# Altium PCB PCB1.PcbDoc (part 1 of 2)
Units mil, origin at the board's own origin, x right, y up, seen from the top; angles counter-clockwise.
Board outline 3500 x 3500 mil, 2 copper layers (Top Layer, Bottom Layer); 93 components, 107 nets, 503 pads, 226 vias.
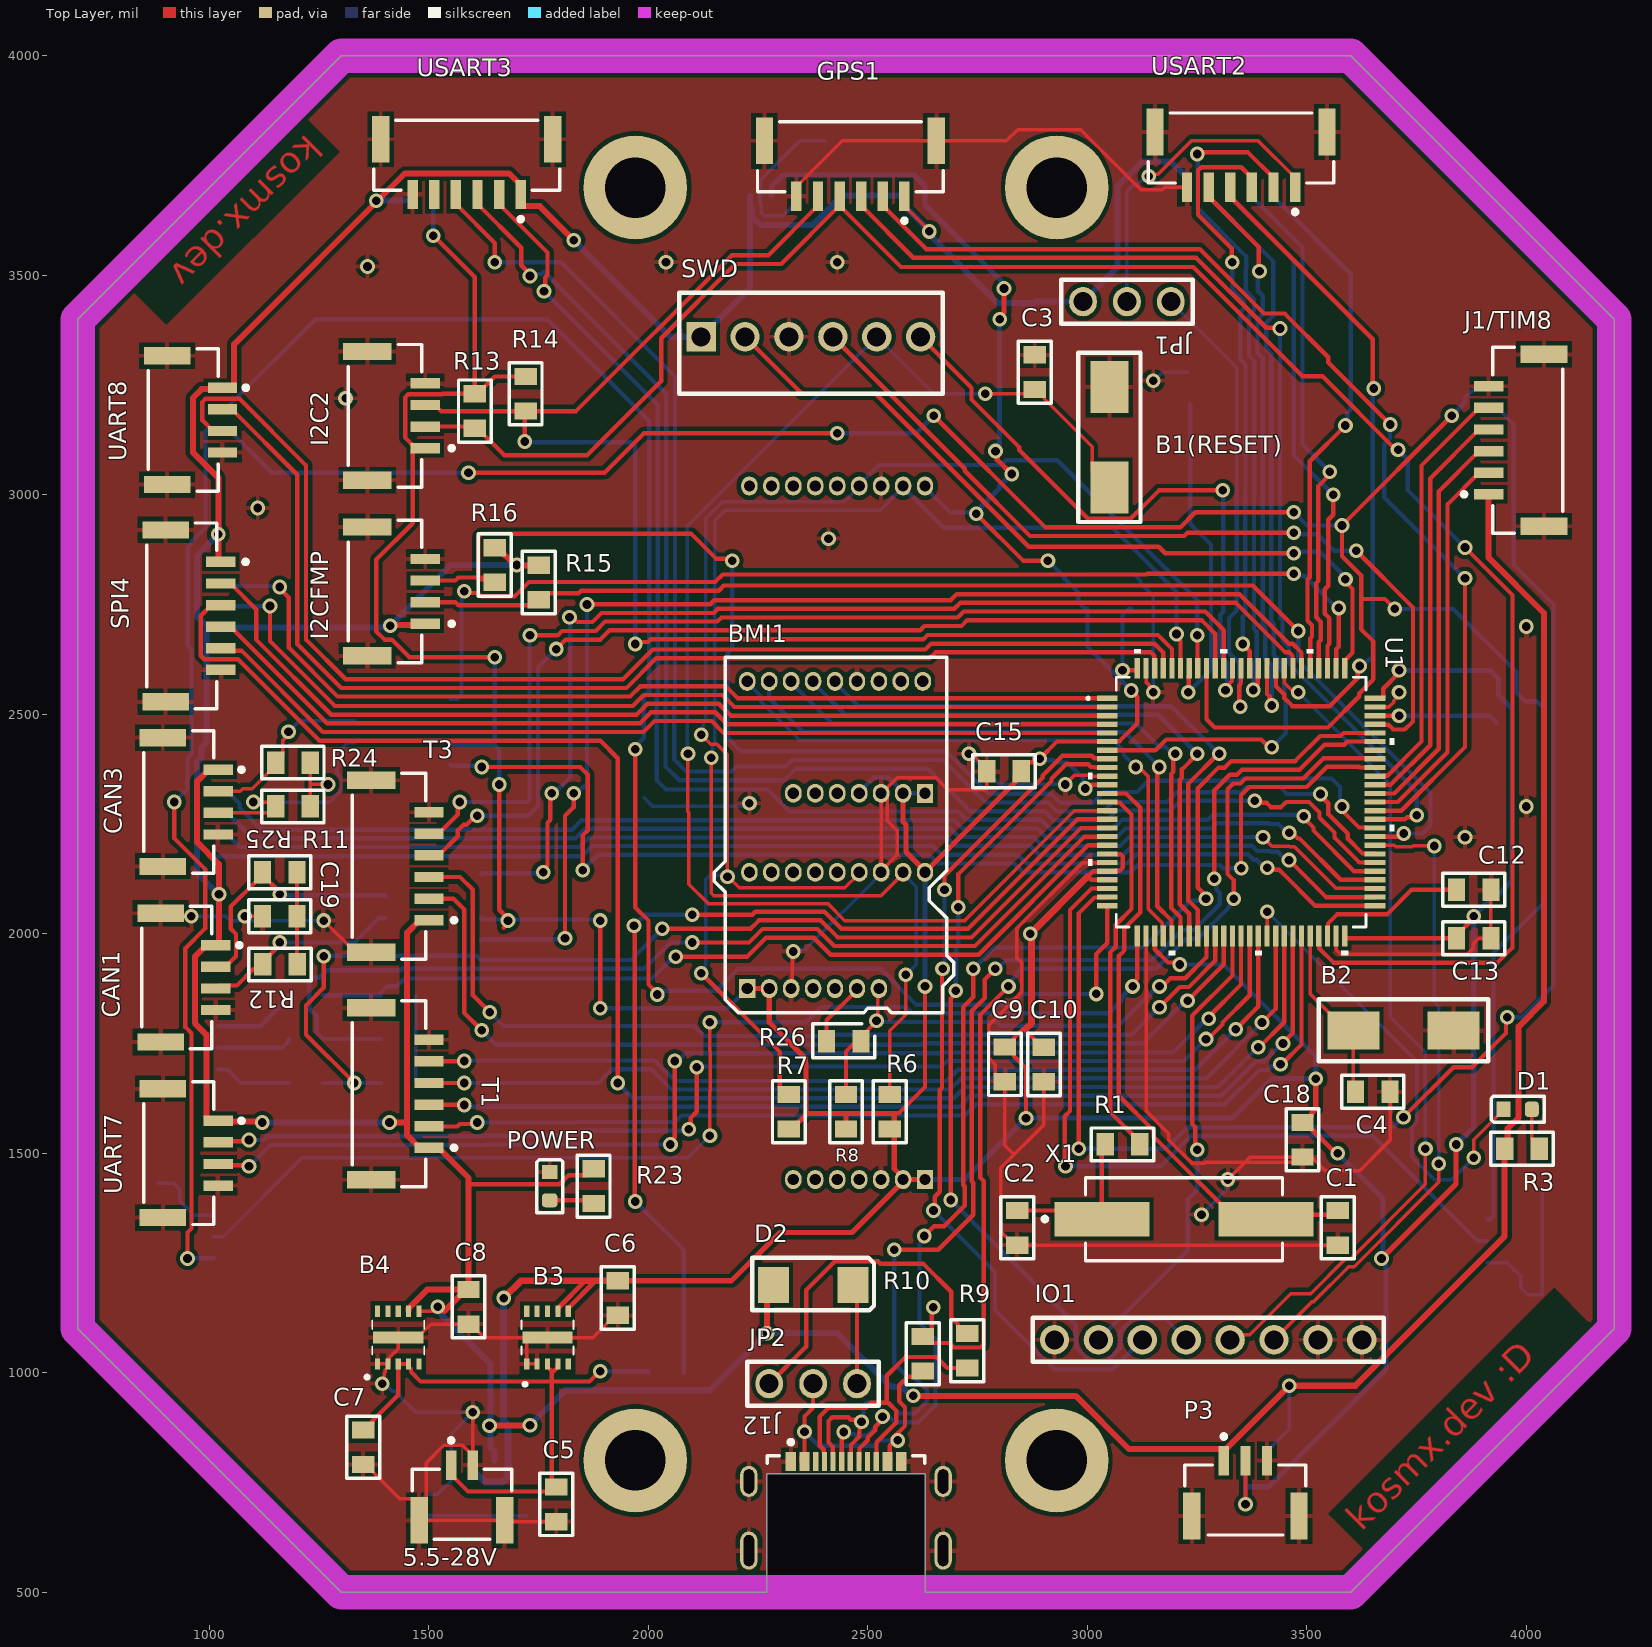
[diagram p0: Top Layer view]
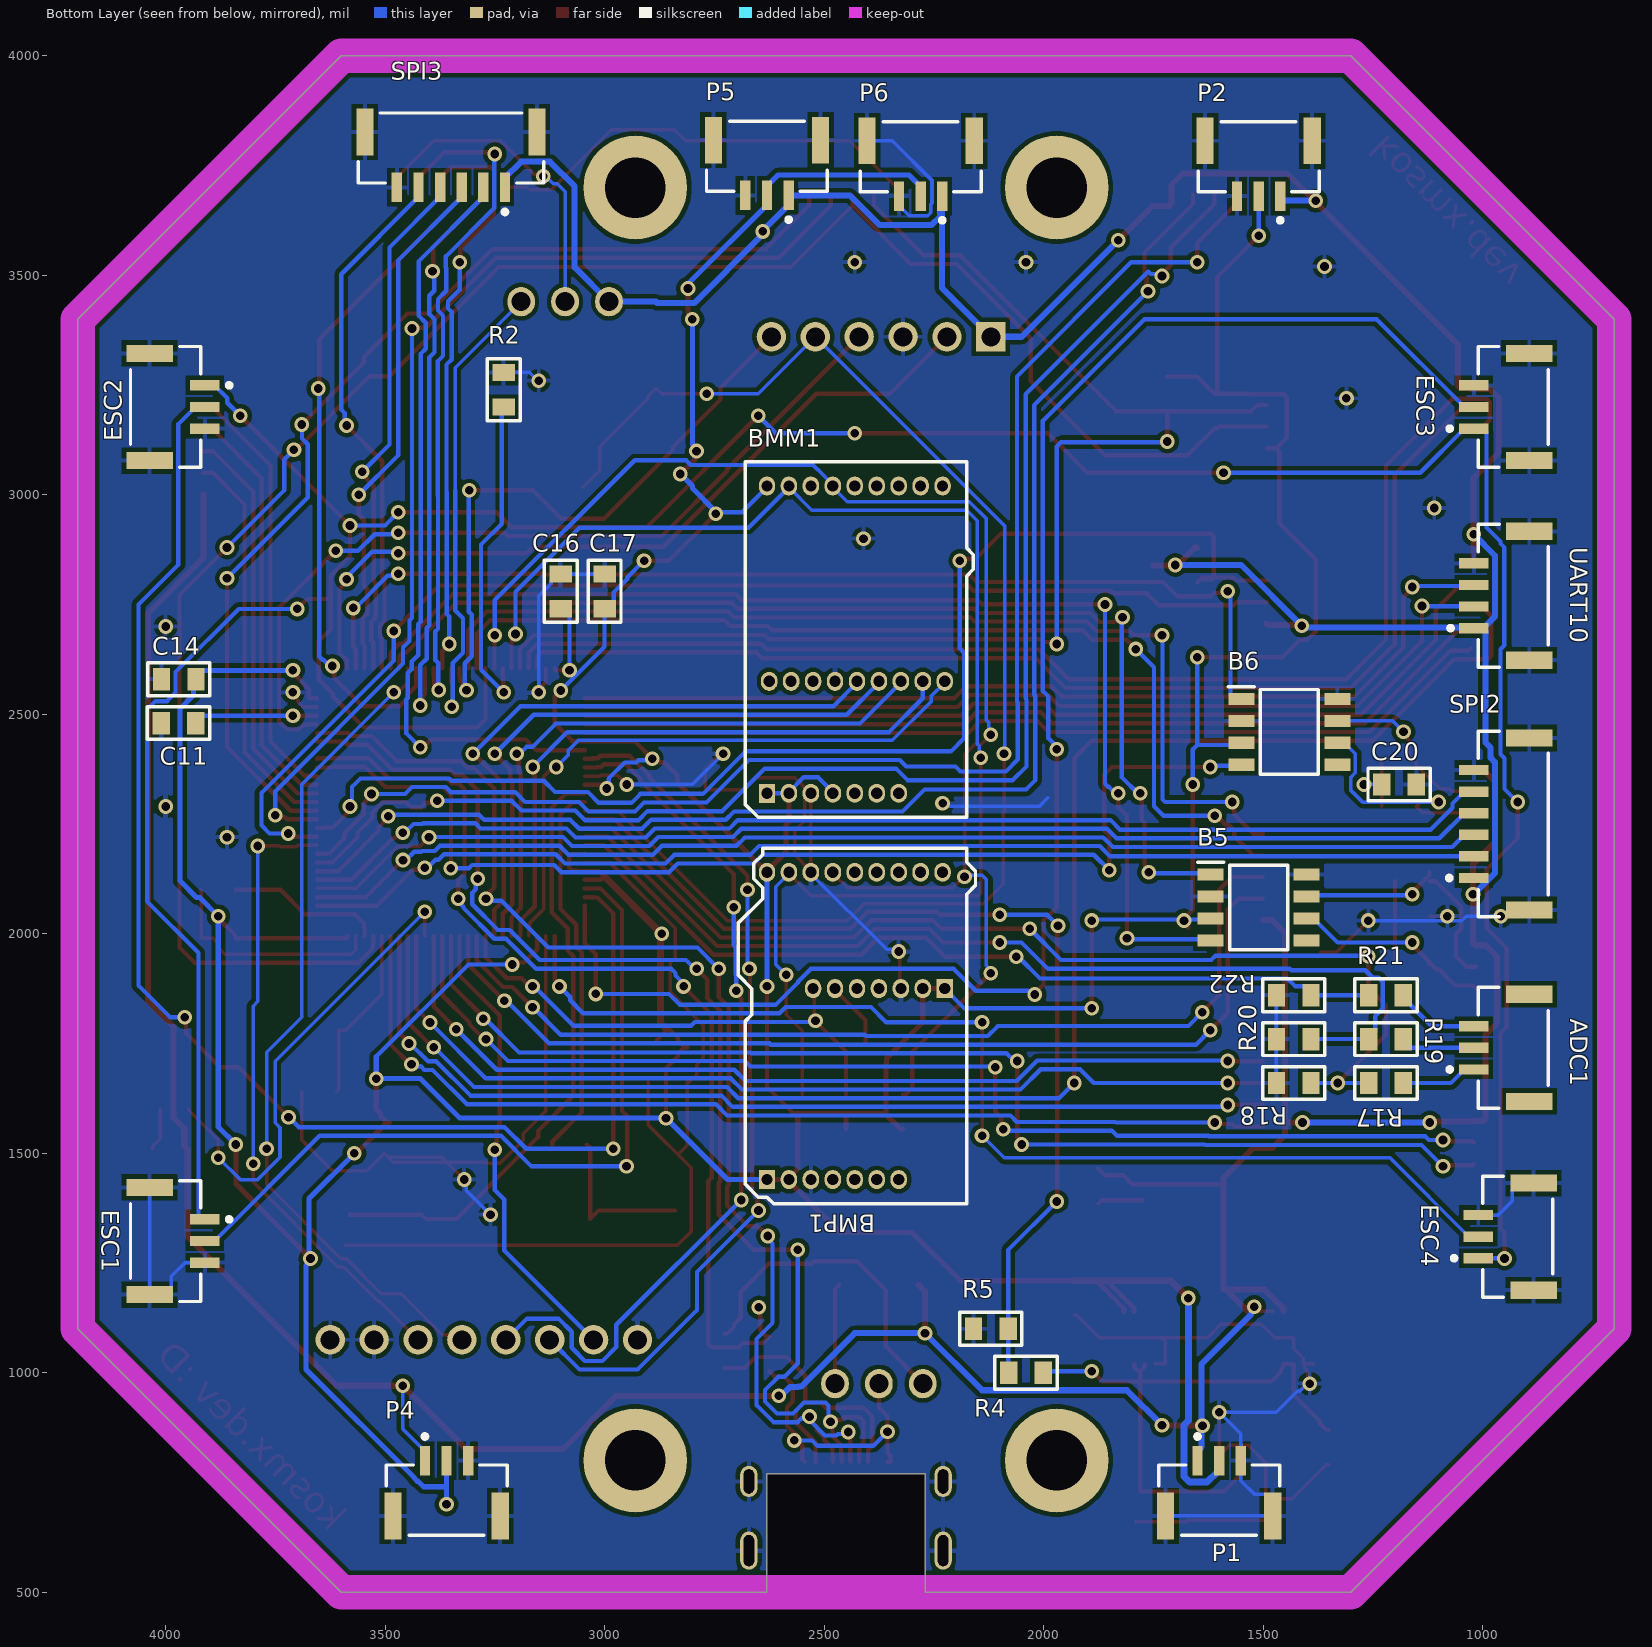
[diagram p1: Bottom Layer view, seen from below]
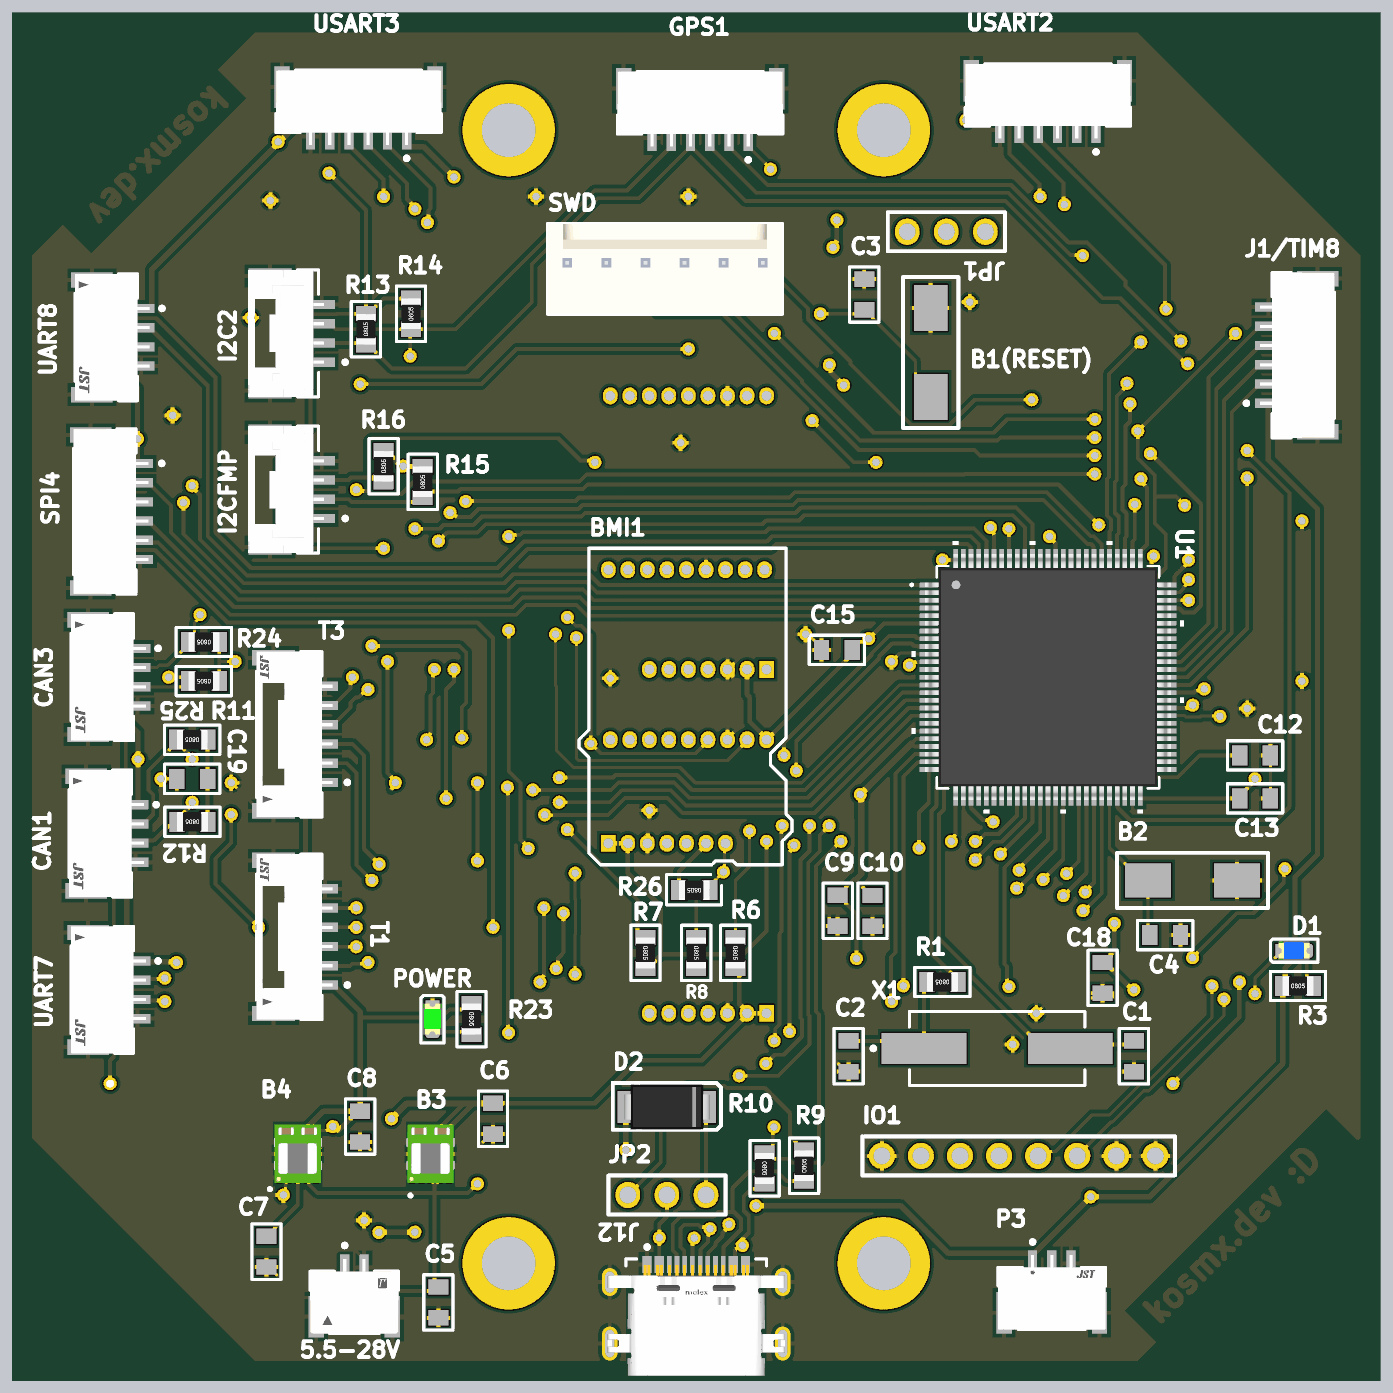
[diagram p3: 3D render of the assembled board from above, using the file's embedded part models]
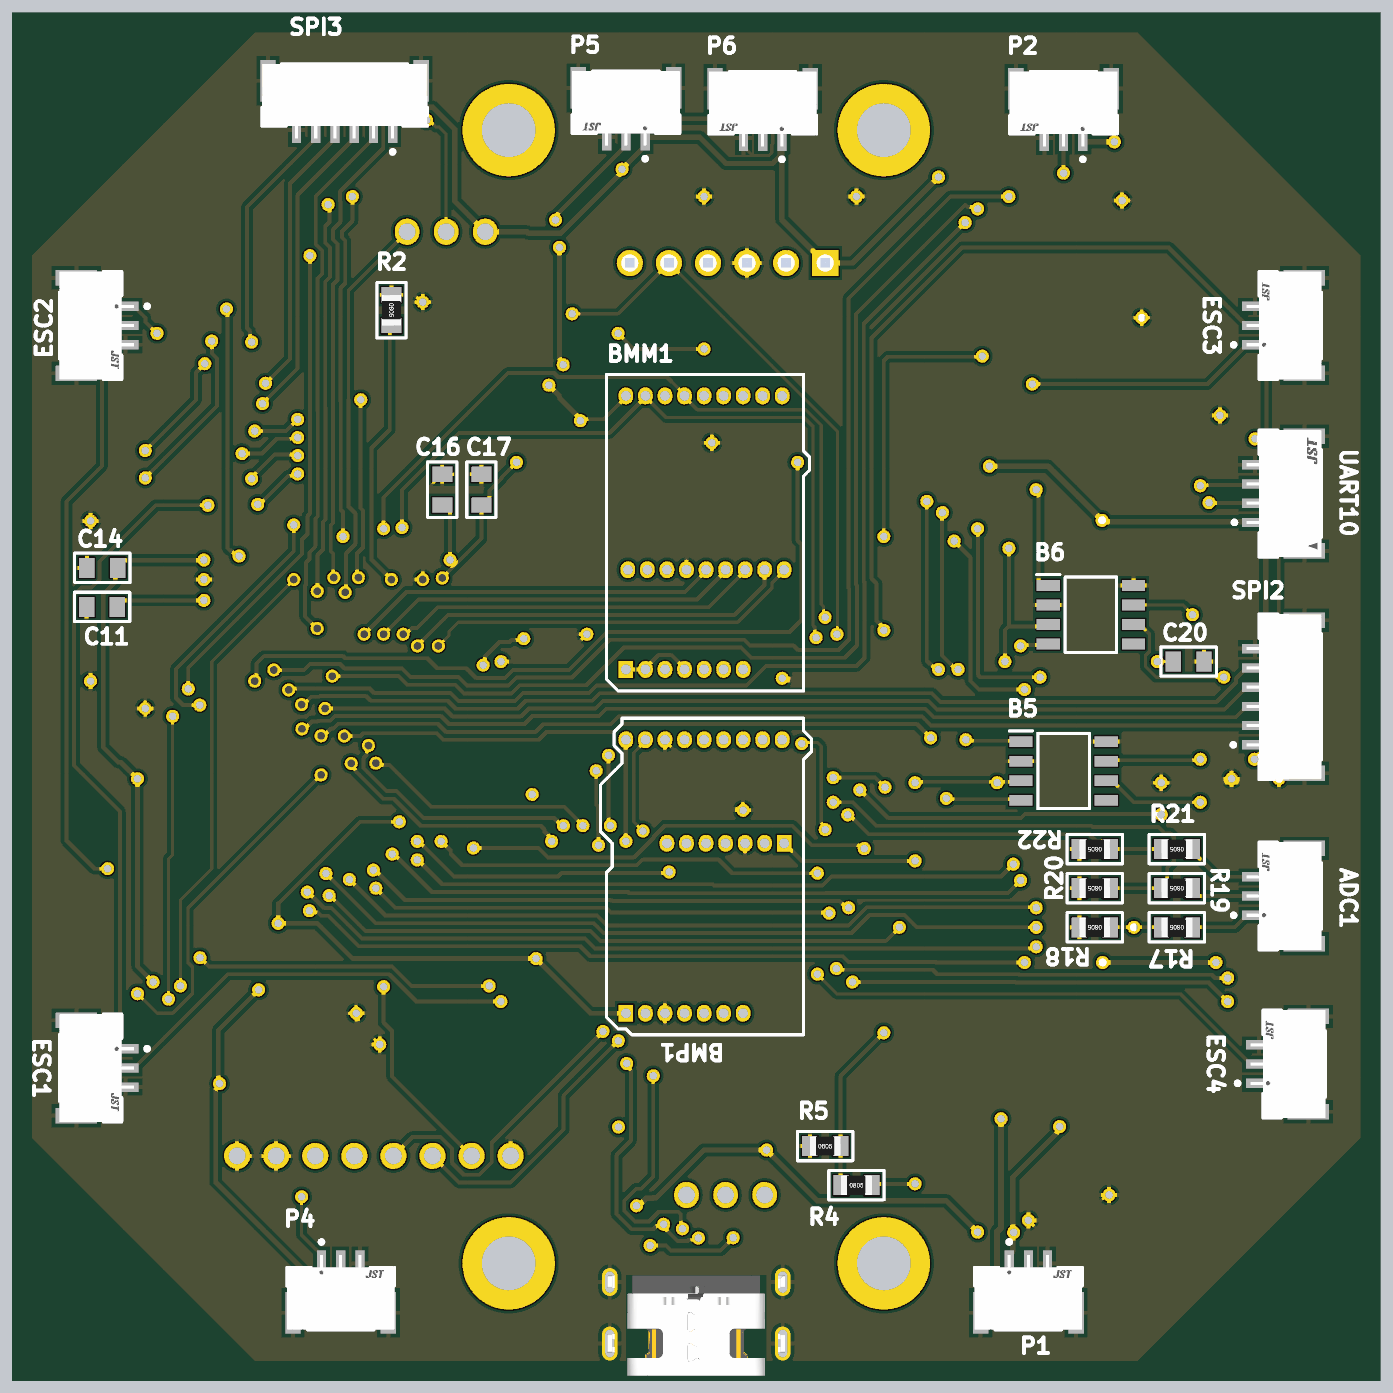
[diagram p4: 3D render of the assembled board from below, using the file's embedded part models]

## Layer stack, top to bottom
Top Solder: solder mask 0.4, Solder Resist, Dk 3.5
Top Layer: signal copper 1.4
Dielectric 1: dielectric 12.6, FR-4, Dk 4.8
Bottom Layer: signal copper 1.4
Bottom Solder: solder mask 0.4, Solder Resist, Dk 3.5

## Board outline
2630,500 2630,770 2270,770 2270,500 1300,500 700,1100 700,3400 1300,4000 3600,4000 4200,3400 4200,1100 3600,500 3500,500

## Design rules (kind name [scope] priority, off if disabled: settings)
Clearance [All] p1: gap=9.84 ignorepadtopadclearanceinfootprint=FALSE except(7.48: Arc-SMDPad Track-SMDPad SMDPad-SMDPad)
HoleSize [All] p1: absolutevalues=TRUE maxlimit=314.96 minlimit=11.81 maxpercent=80.000 minpercent=20.000
HoleToHoleClearance [All] p1: gap=9.84 allowstackedmicrovias=TRUE
MinimumSolderMaskSliver [All] p1: minsoldermaskwidth=3.74
PolygonConnect [All] p1: connectstyle=Relief reliefconductorwidth=10 reliefentries=4 polygonreliefangle="90 Angle" airgapwidth=10
RoutingVias [All] p1: holewidth=19.68 width=33.46 viastyle="Through Hole" minholewidth=11.81 minwidth=25.59 maxholewidth=78.74 maxwidth=98.43
SilkToSilkClearance [All] p1: silktosilkclearance=3.94
SilkToSolderMaskClearance [IsPad] p1: minsilkscreentomaskgap=3.94 clearancetoexposedcopper=TRUE
SolderMaskExpansion [All] p1: expansion=4 istentingtop=FALSE
Width [All] p1: maxlimit=78.74 minlimit=7.87 preferedwidth=10
25 further rules are at their usual default settings.

## Classes and differential pairs
component class powah: 5.5-28V B3 B4 C5 C6 C7 C8 C9 C10 C11 C12 C13 C14 C15 C16 C17 C18 P1 P2 P3 P4 P5 P6 POWER R4 R5 R23
component class on-board_sensors: BMI1 BMM1 BMP1 R6 R7 R8
component class io: GPS1 J1/TIM8 JP1 SWD U1 USART2 USART3
component class io2: B1(RESET) B2 C1 C2 C3 C4 D1 R1 R2 R3 X1
component class GPIO: B5 B6 C19 C20 CAN1 CAN3 I2C2 I2CFMP R11 R12 R13 R14 R15 R16 R24 R25 SPI2 SPI3 T1 T3
component class GPIO2: ADC1 IO1 R17 R18 R19 R20 R21 R22 SPI4 UART7 UART8 UART10
component class ESC_and_USB: D2 ESC1 ESC2 ESC3 ESC4 J12 JP2 R9 R10

## Components (designator, comment, footprint, x,y, rotation, side; value= is the part's Value field where it differs from the comment)
5.5-28V "" FP-SM02B-GHS-TB_LF_SN-MFG 1575,700 r0 top
ADC1 "BM03B-GHS-TBT(LF)(SN)(N)" FP-SM03B-GHS-TB_LF_SN-MFG 930,1740 r90 bottom
B1(RESET) "Button" FP_BTN_SMD_3x6 3050,3131 r90 top
B2 "Button" FP_BTN_SMD_3x6 3720,1780 r0 top
B3 "LMZM23600V3SILR" LMZM23601V5SILR 1770,1062.28 r90 top
B4 "LMZM23600V5SILR" LMZM23601V5SILR 1430,1062.28 r90 top
B5 "BD41041FJ-CE2" SOIC127P600X165-8N 1510,2060 r180 bottom
B6 "BD41041FJ-CE2" SOIC127P600X165-8N 1440,2460 r180 bottom
BMI1 "BMI088_board" DIP7-9 2225,1875 r90 top
BMM1 "BMM150_board" DIP7-9 2630,2320 r90 bottom
BMP1 "BMP390_board_1" DIP7-9 2630,1440 r90 bottom
C1 "22pF" FP_0805_CAP_085 3570,1330 r90 top
C2 "22pF" FP_0805_CAP_085 2840,1330 r90 top
C3 "100nF" FP_0805_CAP_085 2880,3279.37 r90 top
C4 "100nF" FP_0805_CAP_085 3650,1640 r0 top
C5 "10µF" FP_0805_CAP_085 1790,700 r270 top
C6 "33µF" FP_0805_CAP_085 1930,1170 r90 top
C7 "10µF" FP_0805_CAP_085 1350,830 r270 top
C8 "22µF" FP_0805_CAP_085 1590,1150 r90 top
C9 "100nF" FP_0805_CAP_085 2812,1702.37 r90 top
C10 "1µF" FP_0805_CAP_085 2901,1702 r90 top
C11 "2.2μF" FP_0805_CAP_085 3970.63,2480 r180 bottom
C12 "2.2μF" FP_0805_CAP_085 3880,2100 r180 top
C13 "100nF" FP_0805_CAP_085 3880,1990 r180 top
C14 "100nF" FP_0805_CAP_085 3970,2580 r180 bottom
C15 "100nF" FP_0805_CAP_085 2810,2370 r0 top
C16 "100nF" FP_0805_CAP_085 3100,2780 r270 bottom
C17 "100nF" FP_0805_CAP_085 3000,2780 r270 bottom
C18 "100nF" FP_0805_CAP_085 3490,1530.63 r90 top
C19 "4.7nF" FP_0805_CAP_085 1160,2040 r0 top
C20 "4.7nF" FP_0805_CAP_085 1190,2340 r180 bottom
CAN1 "BM04B-GHS-TBT(LF)(SN)(N)" FP-SM04B-GHS-TB_LF_SN-MFG 925,1900 r270 top
CAN3 "BM04B-GHS-TBT(LF)(SN)(N)" FP-SM04B-GHS-TB_LF_SN-MFG 930,2300 r270 top
D1 "LED" FP_0805_LED_BLUE 3980,1600 r180 top
D2 "SCHOTTKY" FP_SMA 2375,1200 r0 top
ESC1 "BM03B-GHS-TBT(LF)(SN)(N)" FP-SM03B-GHS-TB_LF_SN-MFG 4000,1300 r270 bottom
ESC2 "BM03B-GHS-TBT(LF)(SN)(N)" FP-SM03B-GHS-TB_LF_SN-MFG 4000,3200 r270 bottom
ESC3 "BM03B-GHS-TBT(LF)(SN)(N)" FP-SM03B-GHS-TB_LF_SN-MFG 930,3200 r90 bottom
ESC4 "BM03B-GHS-TBT(LF)(SN)(N)" FP-SM03B-GHS-TB_LF_SN-MFG 920,1310 r90 bottom
GPS1 "BM06B-GHS-TBT(LF)(SN)" FP-SM06B-GHS-TB_LF_SN-MFG 2460,3770 r180 top
I2C2 "BM04B-GHS-TBT(LF)(SN)(N)" FP-BM04B-GHS-TBT_LF_SN-MFG 1400,3180 r270 top
I2CFMP "BM04B-GHS-TBT(LF)(SN)(N)" FP-BM04B-GHS-TBT_LF_SN-MFG 1400,2780 r270 top
IO1 "8pin" "PINS 8x1" 3625,1075 r270 top
J1/TIM8 "BM06B-GHS-TBT(LF)(SN)" FP-SM06B-GHS-TB_LF_SN-MFG 4003.58,3124.13 r90 top
J12 "216990-0001" USBC-FP-216990-0001-MFG 2450,640 r0 top
JP1 "JMP3" JMP3 3190,3440 r270 top
JP2 "JMP3" JMP3 2275,975 r90 top
P1 "BM03B-GHS-TBT(LF)(SN)(N)" FP-SM03B-GHS-TB_LF_SN-MFG 1600,710 r180 bottom
P2 "BM03B-GHS-TBT(LF)(SN)(N)" FP-SM03B-GHS-TB_LF_SN-MFG 1510,3770 r0 bottom
P3 "BM03B-GHS-TBT(LF)(SN)(N)" FP-SM03B-GHS-TB_LF_SN-MFG 3360,710 r0 top
P4 "BM03B-GHS-TBT(LF)(SN)(N)" FP-SM03B-GHS-TB_LF_SN-MFG 3360,710 r180 bottom
P5 "BM03B-GHS-TBT(LF)(SN)(N)" FP-SM03B-GHS-TB_LF_SN-MFG 2630,3771.54 r0 bottom
P6 "BM03B-GHS-TBT(LF)(SN)(N)" FP-SM03B-GHS-TB_LF_SN-MFG 2280,3770 r0 bottom
POWER "LED" FP_0805_LED_GREEN 1775,1425 r90 top
R1 "0" FP_0805_RES 3080,1520 r180 top
R2 "10K" FP_0805_RES 3230,3239.37 r270 bottom
R3 "470" FP_0805_RES 3990,1510 r0 top
R4 "180K" FP_0805_RES 2040,1000 r180 bottom
R5 "24K" FP_0805_RES 2120,1100 r180 bottom
R6 "1K8" FP_0805_RES 2550,1594.37 r270 top
R7 "1K8" FP_0805_RES 2320,1594.37 r270 top
R8 "1K" FP_0805_RES 2450,1594.37 r270 top
R9 "5K1" FP_0805_RES 2726,1050 r90 top
R10 "5K1" FP_0805_RES 2625,1043 r270 top
R11 "60" FP_0805_RES 1160,2140 r180 top
R12 "60" FP_0805_RES 1160.63,1930 r180 top
R13 "1K8" FP_0805_RES 1604.58,3190.63 r90 top
R14 "1K8" FP_0805_RES 1720,3230 r90 top
R15 "1K8" FP_0805_RES 1750,2800 r90 top
R16 "1K8" FP_0805_RES 1650,2840 r90 top
R17 "0" FP_0805_RES 1220,1660 r0 bottom
R18 "INF" FP_0805_RES 1430,1660 r0 bottom
R19 "0" FP_0805_RES 1220,1760 r0 bottom
R20 "INF" FP_0805_RES 1430,1760 r0 bottom
R21 "180K" FP_0805_RES 1220,1860 r0 bottom
R22 "24K" FP_0805_RES 1430,1860 r0 bottom
R23 "470" FP_0805_RES 1875,1425 r270 top
R24 "60" FP_0805_RES 1190,2390 r180 top
R25 "60" FP_0805_RES 1190,2290 r180 top
R26 "220" FP_0805_RES 2445,1755 r180 top
SPI2 "BM06B-GHS-TBT(LF)(SN)" FP-SM06B-GHS-TB_LF_SN-MFG 930,2250 r90 bottom
SPI3 "BM06B-GHS-TBT(LF)(SN)" FP-SM06B-GHS-TB_LF_SN-MFG 3350,3790 r0 bottom
SPI4 "BM06B-GHS-TBT(LF)(SN)" FP-SM06B-GHS-TB_LF_SN-MFG 936.42,2724.13 r270 top
SWD "Connector" FP_CONN6_TAP_254MM 2120,3360 r270 top
T1 "BM06B-GHS-TBT(LF)(SN)" FP-BM06B-GHS-TBT_LF_SN-MFG 1408.46,1635.39 r90 top
T3 "BM06B-GHS-TBT(LF)(SN)" FP-BM06B-GHS-TBT_LF_SN-MFG 1408.46,2153.82 r90 top
U1 "STM32F423VHT6" LQFP100-14x14mm 3350,2300 r0 top
UART7 "BM04B-GHS-TBT(LF)(SN)(N)" FP-SM04B-GHS-TB_LF_SN-MFG 930,1500 r270 top
UART8 "BM04B-GHS-TBT(LF)(SN)(N)" FP-SM04B-GHS-TB_LF_SN-MFG 940,3170 r270 top
UART10 "BM04B-GHS-TBT(LF)(SN)(N)" FP-SM04B-GHS-TB_LF_SN-MFG 930,2770 r90 bottom
USART2 "BM06B-GHS-TBT(LF)(SN)" FP-SM06B-GHS-TB_LF_SN-MFG 3350,3790 r180 top
USART3 "BM06B-GHS-TBT(LF)(SN)" FP-SM06B-GHS-TB_LF_SN-MFG 1585.87,3773.58 r180 top
X1 "ECS-80-18-5PX-TR" ECS-80-18-5PX-TR_V 3220,1350 r0 top

## Footprints (in the part's own frame and the unit in brackets; to place one, negate y for a bottom-side part, rotate by r counter-clockwise, add the part's x,y. Pads: shape width x height; smd on the part's side, far side on the other; paste and mask are expansions set on the pad)
DIP7-9 [mm]
  rect 1.1x0.95 hole 0.65: 1(0,0)
  oval 1.1x0.95 hole 0.65: 2(0,-1.27) 3(0,-2.54) 4(0,-3.81) 5(0,-5.08) 6(0,-6.35) 7(0,-7.62) 8(17.78,0) 9(17.78,-1.27) 10(17.78,-2.54) 11(17.78,-3.81) 12(17.78,-5.08) 13(17.78,-6.35) 14(17.78,-7.62) 15(17.78,-8.89) 16(17.78,-10.16)
  silkscreen extent -1.4,-11.94 19.18,1.91
ECS-80-18-5PX-TR_V [mm] "SMD, 2-Leads, Body 11.4x4.8mm, Height 4.3mm"
  rect 5.5x2 smd: 1(-4.75,0) 2(4.75,0)
  silkscreen extent -8.17,-2.4 5.7,2.4, body extent -6.6,-2.4 6.6,2.4, height 4.3
FP-BM04B-GHS-TBT_LF_SN-MFG [mm]
  rect 0.6x1.7 smd paste+0 mask+0: 1(1.875,2.325) 2(0.625,2.325) 3(-0.625,2.325) 4(-1.875,2.325)
  rect 1x2.8 smd paste+0 mask+0: 5(-3.725,-1.025) 6(3.725,-1.025)
  silkscreen extent -4.13,-2.12 4.13,3.98, body extent -4.33,-2.52 4.33,3.27, height 0.25
FP-BM06B-GHS-TBT_LF_SN-MFG [mm]
  rect 0.6x1.7 smd paste+0 mask+0: 1(-3.125,-2.325) 2(-1.875,-2.325) 3(-0.625,-2.325) 4(0.625,-2.325) 5(1.875,-2.325) 6(3.125,-2.325)
  rect 1x2.8 smd paste+0 mask+0: 7(-4.975,1.025) 8(4.975,1.025)
  silkscreen extent -5.38,-3.9 5.38,2.12, body extent -5.58,-3.27 5.58,2.52, height 0.25
FP-SM02B-GHS-TB_LF_SN-MFG [mm]
  rect 0.6x1.7 smd paste+0 mask+0: 1(-0.625,2.275) 2(0.625,2.275)
  rect 1x2.7 smd paste+0 mask+0: 3(-2.475,-0.925) 4(2.475,-0.925)
  silkscreen extent -2.88,-2.02 2.88,3.82, body extent -3.08,-2.37 3.08,3.22, height 0.25
FP-SM03B-GHS-TB_LF_SN-MFG [mm]
  rect 0.6x1.7 smd paste+0 mask+0: 1(-1.25,2.275) 2(0,2.275) 3(1.25,2.275)
  rect 1x2.7 smd paste+0 mask+0: 4(-3.1,-0.925) 5(3.1,-0.925)
  silkscreen extent -3.5,-2.02 3.5,3.8, body extent -3.5,-2.02 3.5,2.83, height 4.25
FP-SM04B-GHS-TB_LF_SN-MFG [mm]
  rect 0.6x1.7 smd paste+0 mask+0: 1(-1.875,2.275) 2(-0.625,2.275) 3(0.625,2.275) 4(1.875,2.275)
  rect 1x2.7 smd paste+0 mask+0: 5(-3.725,-0.925) 6(3.725,-0.925)
  silkscreen extent -4.13,-2.02 4.13,3.75, body extent -4.33,-2.37 4.33,3.22, height 0.25
FP-SM06B-GHS-TB_LF_SN-MFG [mm]
  rect 0.6x1.7 smd paste+0 mask+0: 1(-3.125,2.275) 2(-1.875,2.275) 3(-0.625,2.275) 4(0.625,2.275) 5(1.875,2.275) 6(3.125,2.275)
  rect 1x2.7 smd paste+0 mask+0: 7(-4.975,-0.925) 8(4.975,-0.925)
  silkscreen extent -5.38,-2.02 5.38,3.82, body extent -5.58,-2.37 5.58,3.22, height 0.25
FP_0805_CAP_085 [mm] "0805 kapacit�s YAGEO 0.85mm magas"
  rect 1x1.3 smd: 1(-1,0) 2(1,0)
  silkscreen extent -1.8,-0.95 1.8,0.95, body extent -1,-0.64 1.03,0.64, height 0.85
FP_0805_LED_BLUE [mm] "0805i"
  rrect50% 0.8x0.9 smd: A(-0.825,0)
  rect 0.8x0.9 smd: K(0.825,0)
  silkscreen extent -1.55,-0.75 1.53,0.75, body extent -1.01,-0.63 1.01,0.63, height 1.1
FP_0805_LED_GREEN [mm] "0805 m�ret� z�ld LED"
  rrect50% 0.8x0.9 smd: A(-0.825,0)
  rect 0.8x0.9 smd: K(0.825,0)
  silkscreen extent -1.55,-0.75 1.53,0.75, body extent -1.01,-0.63 1.01,0.63, height 1.1
FP_0805_RES [mm] "0805 ellen�ll�s"
  rect 1x1.3 smd: 1(-1,0) 2(1,0)
  silkscreen extent -1.8,-0.95 1.8,0.95, body extent -1,-0.62 1,0.63, height 0.62
FP_BTN_SMD_3x6 [mm] "TACT 3x 6 2P"
  rect 3x2.2 smd: 1(-2.9,0) 2(2.9,0)
  silkscreen extent -4.9,-1.8 4.9,1.8, body extent -2.9,-1.6 2.9,1.6, height 3.5
FP_CONN6_TAP_254MM [mm] "�ll� hat p�lus� t�pcsatlakoz� 2.54mm"
  rect 1.7x1.7 hole 1.1: 1(0,0)
  round 1.7 hole 1.1: 2(0,2.54) 3(0,5.08) 4(0,7.62) 5(0,10.16) 6(0,12.7)
  silkscreen extent -2.54,-1.27 3.3,13.97, body extent -2.52,-1.27 3.28,13.97, height 11.56
FP_SMA [mm] "SMA footprint"
  rect 1.8x2.1 smd: 1(-2.3,0) 2(2.3,0)
  silkscreen extent -3.52,-1.48 3.52,1.58, body extent -2.8,-1.47 2.8,1.48, height 2.7
JMP3 [mm]
  oval 1.7x1.6 hole 1.1: 1(0,0) 2(0,-2.54) 3(0,-5.08)
  silkscreen extent -1.27,-6.35 1.27,1.27
LMZM23601V5SILR [mm]
  rect 0.65x0.3 smd: 1(-1.075,1.2) 2(-1.075,0.6) 3(-1.075,0) 4(-1.075,-0.6) 5(-1.075,-1.2) 6(1.975,-1.2) 7(1.975,-0.6) 8(1.975,0) 9(1.975,0.6) 10(1.975,1.2)
  rect 0.7x2.9 smd: 11(0.45,0)
  silkscreen extent -2.35,-1.5 1.45,1.5, body extent -1.44,-1.5 2.36,1.5, height 1.49
LQFP100-14x14mm [mil]
  rect 47x12 smd paste+0 mask+0: 1(-305.12,236.22) 2(-305.12,216.54) 3(-305.12,196.85) 4(-305.12,177.17) 5(-305.12,157.48) 6(-305.12,137.8) 7(-305.12,118.11) 8(-305.12,98.43) 9(-305.12,78.74) 10(-305.12,59.06) 11(-305.12,39.37) 12(-305.12,19.69) 13(-305.12,0) 14(-305.12,-19.68) 15(-305.12,-39.37) 16(-305.12,-59.06) 17(-305.12,-78.74) 18(-305.12,-98.43) 19(-305.12,-118.11) 20(-305.12,-137.8) 21(-305.12,-157.48) 22(-305.12,-177.17) 23(-305.12,-196.85) 24(-305.12,-216.54) 25(-305.12,-236.22) 51(305.12,-236.22) 52(305.12,-216.54) 53(305.12,-196.85) 54(305.12,-177.17) 55(305.12,-157.48) 56(305.12,-137.8) 57(305.12,-118.11) 58(305.12,-98.43) 59(305.12,-78.74) 60(305.12,-59.06) 61(305.12,-39.37) 62(305.12,-19.68) 63(305.12,0) 64(305.12,19.68) 65(305.12,39.37) 66(305.12,59.06) 67(305.12,78.74) 68(305.12,98.43) 69(305.12,118.11) 70(305.12,137.8) 71(305.12,157.48) 72(305.12,177.17) 73(305.12,196.85) 74(305.12,216.54) 75(305.12,236.22)
  rect 12x47 smd paste+0 mask+0: 26(-236.22,-305.12) 27(-216.54,-305.12) 28(-196.85,-305.12) 29(-177.17,-305.12) 30(-157.48,-305.12) 31(-137.8,-305.12) 32(-118.11,-305.12) 33(-98.43,-305.12) 34(-78.74,-305.12) 35(-59.06,-305.12) 36(-39.37,-305.12) 37(-19.68,-305.12) 38(0,-305.12) 39(19.68,-305.12) 40(39.37,-305.12) 41(59.06,-305.12) 42(78.74,-305.12) 43(98.43,-305.12) 44(118.11,-305.12) 45(137.8,-305.12) 46(157.48,-305.12) 47(177.17,-305.12) 48(196.85,-305.12) 49(216.54,-305.12) 50(236.22,-305.12) 76(236.22,305.12) 77(216.54,305.12) 78(196.85,305.12) 79(177.17,305.12) 80(157.48,305.12) 81(137.8,305.12) 82(118.11,305.12) 83(98.43,305.12) 84(78.74,305.12) 85(59.06,305.12) 86(39.37,305.12) 87(19.68,305.12) 88(0,305.12) 89(-19.68,305.12) 90(-39.37,305.12) 91(-59.06,305.12) 92(-78.74,305.12) 93(-98.43,305.12) 94(-118.11,305.12) 95(-137.8,305.12) 96(-157.48,305.12) 97(-177.17,305.12) 98(-196.85,305.12) 99(-216.54,305.12) 100(-236.22,305.12)
  silkscreen extent -351,-349 349,349, body extent -315,-315 315,315, height 63
"PINS 8x1" [mm]
  round 1.7 hole 1.1: 1(0,0) 2(0,-2.54) 3(0,-5.08) 4(0,-7.62) 5(0,-10.16) 6(0,-12.7) 7(0,-15.24) 8(0,-17.78)
  silkscreen extent -1.27,-19.05 1.27,1.27
SOIC127P600X165-8N [mm]
  rect 1.5x0.7 smd: 1(-2.775,1.905) 2(-2.775,0.635) 3(-2.775,-0.635) 4(-2.775,-1.905) 5(2.775,-1.905) 6(2.775,-0.635) 7(2.775,0.635) 8(2.775,1.905)
  silkscreen extent -3.52,-2.45 1.68,2.61
USBC-FP-216990-0001-MFG [mm]
  rrect100% 1x1.8 hole 0.6 slot 1.4 at 90 deg paste-1000 mask+0: 1(-5.62,2.85) 2(5.62,2.85)
  rrect100% 1x2.2 hole 0.6 slot 1.8 at 90 deg paste-1000 mask+0: 3(-5.62,-1.15) 4(5.62,-1.15)
  rect 0.6x1.1 smd paste+0 mask+0: A1-B12(-3.2,4) A4-B9(-2.4,4) A9-B4(2.4,4) A12-B1(3.2,4)
  rect 0.3x1.1 smd paste+0 mask+0: A5(-1.25,4) A6(-0.25,4) A7(0.25,4) A8(1.25,4) B5(1.75,4) B6(0.75,4) B7(-0.75,4) B8(-1.75,4)
  silkscreen extent -4.57,3.9 4.57,5.25, body extent -6.22,-3.45 6.22,4.65, height 0.25

## Part data
5.5-28V: library part CMP-2000-05957-2, "2p", Color=Natural, Connector Type="Outer Shroud Contact", Contact Plating=Tin, Fastening Type=Ramp, Lead Free="Lead Free", Mount="Surface Mount", Number of Positions=2, Number of Rows=1, Packaging="Tape and Reel", Pitch=0.049inch, Termination=Solder
ADC1 ESC1 ESC2 ESC3 ESC4 P1 P2 P3 P4 P5 P6: library part CMP-17439-000058-1, "3p", Color=Natural, Flammability Rating="UL94 V-0", Max Operating Temperature=85°C, Min Operating Temperature=-25°C, Connector Type=Header, Contact Finish - Mating=TIN, Contact Material=Bronze, Contact Plating=Tin, Contact Shape=Rectangular, Contact Type="Outer Shroud Contact", Fastening Type=Ramp, Insulation Color=Natural, Insulation Material=Nylon, Lead Free="Lead Free", Mount="Surface Mount", Number of Positions=3, Number of Rows=1, Packaging="Cut Tape", Pitch=0.049inch, Series=GH, Termination=Solder
B1(RESET) B2: library part "Button 2P", "Push button"
B3: "36-V, 0.5-A Step-Down DC/DC Power Module in 3.8-mm  3-mm Package", Manufacturer_Name="Texas Instruments", Mouser Part Number=595-LMZM23600V3SILR, Datasheet Link=http://www.ti.com/lit/gpn/lmzm23600, Geometry.Height=1.578mm, Manufacturer_Part_Number=LMZM23600V3SILR, Mouser Price/Stock=https://www.mouser.co.uk/ProductDetail/Texas-Instruments/LMZM23600V3SILR?qs=55YtniHzbhDJv8FpBtYOcw%3D%3D
B4: "36-V, 0.5-A Step-Down DC/DC Power Module in 3.8-mm  3-mm Package", Manufacturer_Name="Texas Instruments", Mouser Part Number=595-LMZM23600V5SILR, Datasheet Link=http://www.ti.com/lit/gpn/lmzm23600, Geometry.Height=1mm, Manufacturer_Part_Number=LMZM23600V5SILR, Mouser Price/Stock=https://www.mouser.co.uk/ProductDetail/Texas-Instruments/LMZM23600V5SILR?qs=55YtniHzbhCRfZgYPiZvxw%3D%3D
B5 B6: "ROHM Semiconductor CAN Transceiver for Automotive", Manufacturer_Name="ROHM Semiconductor", Mouser Part Number=755-BD41041FJ-CE2, Datasheet Link=https://datasheet.datasheetarchive.com/originals/distributors/Datasheets_SAMA/414644ee1dc91df04c2a44596c540576.pdf, Geometry.Height=1.65mm, Manufacturer_Part_Number=BD41041FJ-CE2, Mouser Price/Stock=https://www.mouser.co.uk/ProductDetail/ROHM-Semiconductor/BD41041FJ-CE2?qs=%252BEew9%252B0nqrCizAYMbF4Vxg%3D%3D
C1 C2 C3 C4 C5 C6 C7 C8 C9 C10 C11 C12 C13 C14 C15 C16 C17 C18 C19 C20: library part CAP, "Capacitor"
CAN1 CAN3 I2C2 I2CFMP UART7 UART8 UART10: library part CMP-17439-000054-1, "4p", Color=Natural, Connector Type="Outer Shroud Contact", Contact Plating=Tin, Fastening Type=Ramp, Lead Free="Lead Free", Mount="Surface Mount", Number of Pins=4, Number of Positions=4, Number of Rows=1, Packaging="Tape and Reel", Pitch=0.049inch, Termination=Solder
D1 POWER: "Typical RED GaAs LED", Supplier=lomex, Verified=false
D2: "Schottky diode"
GPS1 J1/TIM8 SPI2 SPI3 SPI4 T1 T3 USART2 USART3: library part CMP-17439-000166-1, "6p", Current Rating=1A, Housing Color=Natural, Voltage Rating=50V, Contact Material=Bronze, Housing Material=Nylon, Lead Free="Lead Free", Mount="Surface Mount", Number of Contacts=6, Number of Positions=6, Number of Rows=1, Orientation=Straight, Packaging="Cut Tape", Pitch=1.25mm, Series=GH, Termination=Solder
J12: library part CMP-04767-000014-1, "CONN RCP USB2.0 TYP C 24P SMD RA"
R1 R2 R3 R4 R5 R6 R7 R8 R9 R10 R11 R12 R13 R14 R15 R16 R17 R18 R19 R20 R21 R22 R23 R24 R25 R26: library part RES, "Resistor"
SWD: library part Connector_6pin, "6pin connector"
U1: "No Description Available", Mfr_Name=STMicroelectronics, RefDes=RefDes, Type=Type
X1: library part CMP-2000-06193-1, "Low Profile Quartz Crystal, 8.0 MHz, 2-Pin SMD, RoHS, Tape and Reel", Case Height=4.3mm, Case Length=13.2mm, Case Width=4.8mm, Frequency=8MHz, Frequency Stability=50PPM, Load Capacitance=18pF, Manufacturer=ECS, Operating Temperature Range=-10Cto+70C, Package / Case=HC-49/US, Package Description="2-Pin Surface Mount Device, Body 11.4 x 4.8 mm, Height 4.3 mm", Tolerance=30PPM, Brand=ECS, Datasheet URL=https://www.ecsxtal.com/store/pdf/csm-7x.pdf, Datasheet Version=05/2016, Dimensions=4.8mmWx13.2mmLx4.3mmH, Factory Pack Quantity=1000, Manufacturer URL=https://www.ecsxtal.com/, Mounting Style=SMD/SMT, Mounting Technology=SurfaceMount, Package Reference=ECS-80-18-5PX-TR, Packaging=Reel, Product Category=Crystals, RoHS=Details, Series=CSM-7X, Termination Style=SMD/SMT, Type=SMDQuartzCrystals

## Free pads (board coordinates)
  round 236.22 hole 137.8: ""(1970,800) ""(1970,3700) ""(2930,800) ""(2930,3700)

## Via types
v1: diameter 33.46, hole 19.68, Top Layer to Bottom Layer, 226 vias

## Nets (pads, with @x,y where several pads share a name; then routed paths per layer and width w, separated by ;. In a path a pad name is that pad's centre, name@x,y a point inside that pad or via, vN(x,y) a via of type N, cw(c..) or ccw(c..) an arc to the next point about the centre after c; other vN are vias at no path point)
3V3: B3.6 B3.7 B5.3 B6.3 BMI1.1 BMI1.2 BMM1.1 BMM1.2 BMM1.4 BMM1.8 BMP1.1 BMP1.2 BMP1.8 C6.2 C9.2 C10.2 C13.2 C14.2 C15.2 C16.2 C17.2 C18.2 I2C2.1 P1.2 P2.2 P3.2 P4.2 P5.2 P6.2 R6.2 R7.2 R8.2 R13.2 R14.2 U1.6 U1.11 U1.19 U1.21 U1.22 U1.28 U1.50 U1.75 U1.100 | length 15847.7
  Top Layer w9.84: I2C2.1@1491.54,3106.18 I2C2.1@1469.88,3106.18 ; v1(1510,3590) 1604.58,3495.42 R13.2@1604.58,3230 ; v1(1650,2630) 1455.33,2630 1415.33,2670 1398.45,2670 1380,2688.45 1380,2852.37 1462.99,2935.37 1462.99,3099.29 I2C2.1@1469.88,3106.18 ; v1(1660,2340) 1660,2054.54 1680,2034.54 v1(1680,2030) 1680,2023.61 1670,2013.61 ; R14.2@1720,3269.37 1649.86,3269.37 1610.49,3230 R13.2@1604.58,3230 ; v1(1890,1830) v1(1890,2030) ; v1(2746.54,2956.54) 2853.08,2850 v1(2910,2850) ; C9.2@2812,1741.74 C9.2@2817.91,1741.74 ; C15.2@2834.61,2344.61 2834.61,2361.14 2864.13,2390.67 2877.35,2390.67 2885.29,2398.61 v1(2891.39,2398.61) ; v1(2860,1580) 2860,1693.74 2832.67,1721.07 2832.67,1726.98 C9.2@2817.91,1741.74 ; C10.2@2880.33,1757.86 2854.22,1783.96 2832.67,1762.41 2832.67,1756.5 C9.2@2817.91,1741.74 ; v1@2891.54,2398.46 2930.87,2437.8 3062.38,2437.8 3063.46,2438.87 3073.31,2438.87 3113.78,2479.34 3113.78,2540.21 v1(3100,2553.99) ; v1(2995.33,2330.94) 3001.72,2330.94 3010.15,2339.37 U1.11@3044.88,2339.37 ; U1.22@3044.88,2122.83 3008.82,2122.83 3001.65,2130 3000,2130 3012.52,2142.52 3062.38,2142.52 3063.46,2143.6 3073.4,2143.6 3080.78,2150.98 3080.78,2175.57 3075.02,2181.33 3045.44,2181.33 U1.19@3044.88,2181.89 ; v1(3080,2600) 3112.7,2600 3113.78,2601.08 U1.100@3113.78,2605.12 ; U1.28@3153.15,1994.88 3153.46,1994.57 3153.46,1964.5 3183.43,1934.52 3205.48,1934.52 v1(3210,1930) ; v1(3360,700) P3.2@3360,799.57 ; U1.50@3586.22,1994.88 3586.22,1991.08 3587.3,1990 C13.2@3840.63,1990 3840.63,1995.91 3880,2035.28 v1(3880,2040) ; U1.75@3655.12,2536.22 3672.62,2536.22 3673.7,2537.3 3673.7,2558.24 3710,2594.54 v1(3710,2600) ; I2C2.1@1469.88,3106.18 1445.67,3130.39 1445.67,3221.55 1452.93,3228.82 1529.35,3228.82 1530.53,3230 R13.2@1604.58,3230
  Top Layer w10: 2560,1590.63 2569.82,1590.63 2630,1650.81 v1(2630,1880)
  Top Layer w11.81: B3.7@1793.62,1140.04 1793.62,1146.93 1856.06,1209.37 ; B3.6@1817.24,1140.04 1817.24,1146.93 1879.68,1209.37 ; C6.2@1930,1209.37 2189.37,1209.37 2299.32,1319.32 2463.78,1319.32 2580,1435.55 BMP1.2@2580,1440 ; BMI1.1@2225,1875 BMI1.2@2275,1875 2275,1798.43 2357.99,1715.44 2357.99,1705.58 2358.98,1704.6 2358.98,1593.19 2361.54,1590.63 ; R7.2@2320,1555 2325.91,1555 2361.54,1590.63 ; R8.2@2450,1555 2450,1590.63 ; BMM1.2@2580,2320 2580,2255 2586.8,2248.2 2586.8,2186.16 2630,2142.95 BMP1.8@2630,2140 C15.2@2834.61,2344.61 ; BMP1.1@2630,1440 BMP1.2@2580,1440 ; v1(2790.46,3099.54) 2794.6,3095.4 2794.6,3079.94 v1(2827.27,3047.27) ; v1(2800,3400) 2800,3405.86 2810,3415.86 v1(2810,3470) ; C18.2@3490,1570 C18.2@3495.91,1570 ; v1(3520,1670) 3520,1600 3510.67,1590.67 3510.67,1584.76 C18.2@3495.91,1570 ; v1(3570,1500) 3565.91,1500 C18.2@3495.91,1570 ; v1(3670,1260) 3840,1430 v1(3840,1520) ; 2361.54,1590.63 2450,1590.63 ; 2450,1590.63 2560,1590.63 2560,1464.45 2580,1444.45 BMP1.2@2580,1440
  Top Layer w15.75: v1(1670,1170) 1709.37,1209.37 1856.06,1209.37 1879.68,1209.37 C6.2@1930,1209.37 ; 2861.72,1784.91 2872.29,1795.48 2872.29,1997.54 v1(2869.83,2000) 2870,2000 3000,2130
  Bottom Layer w9.84: v1(1510,3590) P2.2@1510,3680.43 ; B6.3@1549.25,2435 1554.25,2430 1650,2430 ; B5.3@1619.25,2035 1621.75,2032.5 1887.5,2032.5 v1(1890,2030) ; v1(1650,2630) 1650,2430 ; v1(1660,2340) 1660,2420 1650,2430 ; v1(1890,1830) 2180,1830 2208.27,1858.27 2211.22,1858.27 2225,1872.05 BMI1.1@2225,1875 ; BMM1.4@2480,2320 2480,2322.95 2513.46,2356.42 2546.54,2356.42 2580,2322.95 BMM1.2@2580,2320 BMM1.1@2630,2320 ; BMM1.8@2630,3020 2630,3017.05 2687.05,2960 2743.08,2960 v1@2744.81,2958.27 ; v1(2891.39,2398.61) 2895.08,2394.92 2923.03,2394.92 2927.96,2390 2954.16,2390 2990.81,2353.35 2990.81,2335.46 v1(2995.33,2330.94) ; v1(2910,2850) 2948.52,2811.48 2948.52,2808.03 2979.33,2777.23 2979.33,2755.39 2994.09,2740.63 C17.2@3000,2740.63 3000,2653.99 v1(3100,2553.99) ; v1(3080,2600) 3080,2725.87 3094.76,2740.63 C16.2@3100,2740.63 ; v1(3210,1930) 3310,1930 3520,1720
  Bottom Layer w11.81: P6.2@2280,3680.43 2280,3702.09 2306.73,3728.82 2604.8,3728.82 2630,3703.62 P5.2@2630,3681.97 2630,3660.31 2805.86,3484.46 2805.86,3474.14 v1(2810,3470) ; BMP1.1@2630,1440 2720,1440 v1(2860,1580) 3330,1580 3420,1670 v1(3520,1670) 3520,1720 ; v1(2630,1880) BMP1.8@2630,2140 ; v1@2744.81,2958.27 2744.81,2959.81 2800,3015 2800,3020 v1(2827.27,3047.27) ; v1(2790.46,3099.54) 2790.46,3105.4 2800,3114.94 v1(2800,3400) ; v1(3360,700) 3360,740 ; P4.2@3360,799.57 3360,740 ; v1(3570,1500) 3673.23,1396.77 v1@3673.23,1260 ; v1(3670,1260) 3670,1254.14 3680,1244.14 3680,1007.54 3434.41,761.95 3434.41,760.56 3426.57,752.72 3425.18,752.72 3412.46,740 3360,740 ; v1(3710,2600) 3710.31,2599.69 3916.85,2599.69 3936.39,2580.15 3936.39,2543.61 3967.52,2512.48 3967.52,2120.57 3929.31,2082.35 3922.35,2082.35 v1(3880,2040) 3880,1560 v1(3840,1520)
  Bottom Layer w15.75: P1.2@1600,799.57 1603.94,795.63 1603.94,773.98 1627.17,750.75 1667.38,750.75 1680,763.36 1680,881.22 1670,891.22 v1(1670,1170)
5V: B4.6 B4.7 C8.2 CAN1.1 CAN3.1 D2.1 GPS1.1 I2CFMP.1 J1/TIM8.1 JP1.3 P1.1 P2.1 P3.1 P4.1 P5.1 P6.1 R3.1 R15.2 R16.2 R23.1 SPI2.1 SPI3.1 SPI4.1 SWD.1 T1.1 T3.1 UART7.1 UART8.1 UART10.1 USART3.1 | length 13971.4
  Top Layer w8: B4.6@1477.24,1140.04 v1@1520,1140.04 ; GPS1.1@2583.03,3680.43 2583.03,3658.78 2640,3601.81 v1(2640,3600)
  Top Layer w9.84: 1590,1430 1590.67,1429.33 1797.85,1429.33 1818.13,1449.61 1860.24,1449.61 R23.1@1875,1464.37
  Top Layer w13.78: CAN3.1@1019.57,2373.82 997.91,2373.82 971.73,2347.64 971.73,2208.42 1021.5,2158.65 v1(1021.5,2090) 1021.5,1978.74 1020,1978.74 1015.08,1973.82 992.91,1973.82 966.73,1947.64 966.73,1796.19 992.99,1769.93 992.99,1578.74 997.91,1573.82 UART7.1@1019.57,1573.82 1021.48,1571.91 1118.09,1571.91 v1(1120,1570) ; SPI4.1@1025.98,2847.17 1024.92,2847.17 1020,2852.09 v1(1020,2910) 1020,3038.95 962.05,3096.9 962.05,3220.52 982,3240.47 1026.22,3240.47 UART8.1@1029.57,3243.82 1051.22,3243.82 1056.14,3248.74 1056.14,3342.92 1445.07,3731.85 1682.72,3731.85 1708.9,3705.67 USART3.1@1708.9,3684.02 1708.9,3662.36 1713.82,3657.44 1752.56,3657.44 v1(1830,3580) ; v1(1410,1570) 1450,1570 ; v1(1411.5,2701.5) 1413.84,2703.84 1489.19,2703.84 I2CFMP.1@1491.54,2706.18 ; B4.7@1453.62,1140.04 1453.62,1146.93 1496.06,1189.37 C8.2@1584.09,1189.37 ; T3.1@1500,2030.79 1478.35,2030.79 1450,2002.44 1450,1570 ; v1(1520,1150) 1524.8,1150 1534.76,1140.04 C8.2@1584.09,1189.37 ; v1(1637.73,879.15) 1638.58,880 v1(1730,880) ; R16.2@1650,2879.37 1655.91,2879.37 1695.91,2839.37 R15.2@1750,2839.37 ; v1(2270,1090) 2270,1185.55 D2.1@2284.45,1200 ; v1(2602.88,947.35) 2973.34,947.35 3094.55,826.14 3305.87,826.14 P3.1@3310.79,821.22 ; P3.1@3310.79,799.57 P3.1@3310.79,821.22 ; J1/TIM8.1@3914.02,3001.1 3914.02,2856.61 4040,2730.62 4040,1846.14 3982.36,1788.5 3982.36,1581.06 3957.57,1556.26 3957.57,1516.94 R3.1@3950.63,1510 3950.63,1310.63 3610.22,970.22 v1(3459.78,970.22) P3.1@3310.79,821.22 ; 1450,1570 1450,1540.71 1478.35,1512.36 T1.1@1500,1512.36 1521.65,1512.36 1590,1444.02 1590,1430 C8.2@1590,1189.37 C8.2@1584.09,1189.37
  Bottom Layer w8: P4.1@3409.21,799.57 3409.21,821.22 3459.78,871.79 v1(3459.78,970.22)
  Bottom Layer w13.78: v1(1020,2910) 971.73,2861.73 971.73,2722.36 UART10.1@997.91,2696.18 ; v1(1021.5,2090) 1020,2090 971.73,2138.27 971.73,2390.79 981.42,2400.48 981.42,2423.89 992.99,2435.47 992.99,2691.26 UART10.1@997.91,2696.18 ; v1(1120,1570) v1(1410,1570) ; v1(1380,3670) 1455.87,3670 1460.79,3674.92 P2.1@1460.79,3680.43 ; 1527.67,1132.33 1640,1020 v1@1640,880 ; v1(1637.73,879.15) 1640,876.89 1640,830.43 1649.21,821.22 P1.1@1649.21,799.57 ; v1(1700,2840) 1550,2840 1408.09,2698.09 1021.48,2698.09 UART10.1@1019.57,2696.18 UART10.1@997.91,2696.18 ; v1(1730,880) 1810.04,960.04 2140.04,960.04 v1(2270,1090) 2430.17,1090 2552,968.17 2558.3,968.17 2559.4,967.07 2577.83,967.07 2597.55,947.35 v1(2602.88,947.35) ; v1(1830,3580) 2050,3360 SWD.1@2120,3360 2230.79,3470.79 2230.79,3633.63 2230.79,3651.99 P6.1@2230.79,3658.78 ; P6.1@2230.79,3680.43 P6.1@2230.79,3658.78 ; SPI3.1@3226.97,3700.43 3226.97,3722.09 3190.16,3758.9 3124.45,3758.9 3068.14,3702.59 3068.14,3518.14 JP1.3@2990,3440 2883.43,3440 2879.97,3436.54 2796.14,3436.54 2643.77,3588.91 2643.77,3597.34 2580.79,3660.31 P5.1@2580.79,3681.97 2441.1,3681.97 2373.89,3614.76 2254.85,3614.76 2235.71,3633.89 2235.71,3653.86 P6.1@2230.79,3658.78
ADC11: R17.2 R18.1 U1.16 | length 2428.4
  Top Layer w9.84: v1(1260,1948.5) 1260,1876.8 1220,1836.8 1220,1770 v1(1330,1660) ; v1(2031.5,2011.5) 2232.65,2011.5 2251.52,2030.37 2392.64,2030.37 2431.46,1991.55 2735.93,1991.55 2985.32,2240.94 U1.16@3044.88,2240.94
  Bottom Layer w9.84: R17.2@1259.37,1660 v1(1330,1660) R18.1@1390.63,1660 ; v1(1260,1948.5) 1261.5,1950 1608.2,1950 1618.2,1940 1960,1940 v1(2031.5,2011.5)
ADC12: R19.2 R20.1 U1.17 | length 2261.9
  Top Layer w9.84: v1(2099.43,1980) 2228.99,1980 2259.68,2010.69 2384.48,2010.69 2423.3,1971.87 2744.08,1971.87 2993.47,2221.26 U1.17@3044.88,2221.26
  Bottom Layer w9.84: R20.1@1390.63,1760 R19.2@1259.37,1760 1244.61,1774.76 1244.61,1811.95 1227.28,1829.27 1227.28,1890.73 1236.56,1900 1250,1900 1267.01,1917.01 1435.72,1917.01 1438.72,1920 1990,1920 2050,1980 v1(2099.43,1980)
ADC13: R21.2 R22.1 U1.18 | length 1962.6
  Top Layer w9.84: v1(2062.27,1947.73) 2224.56,1947.73 2267.83,1991 2376.33,1991 2415.15,1952.18 2752.23,1952.18 3001.63,2201.57 U1.18@3044.88,2201.57
  Bottom Layer w9.84: R21.2@1259.37,1860 R22.1@1390.63,1860 1390.63,1865.91 1405.39,1880.67 1427.23,1880.67 1444.55,1897.99 2007.99,1897.99 2057.73,1947.73 v1(2062.27,1947.73)
BAT_VR: R4.1 R5.2 U1.15 | length 2276.4
  Top Layer w9.84: v1(1966.98,2018.48) 1968.49,2016.97 1968.49,1391.51 v1(1970,1390) ; v1(2099.43,2042.99) 2236.31,2042.99 2243.37,2050.06 2400.79,2050.06 2439.61,2011.24 2727.77,2011.24 2977.17,2260.63 U1.15@3044.88,2260.63
  Bottom Layer w9.84: v1(1966.98,2018.48) 1991.5,2042.99 v1(2099.43,2042.99) ; v1(1970,1390) 2080.63,1279.37 R5.2@2080.63,1100 2080.63,1001.26 R4.1@2079.37,1000
BUTTON_PIN: B2.1 C4.1 U1.46 | length 406.8
  Top Layer w8: U1.46@3507.48,1994.88 3507.48,1862.6 3590.08,1780 B2.1@3605.83,1780 3605.83,1644.8 C4.1@3610.63,1640
CAN1.RX: B5.4 U1.81 | length 2706.6
  Top Layer w9.84: v1(1810,1990) 1810,2268.65 1829.85,2288.5 1829.85,2319.85 v1(1830,2320) ; v1(1860,2750) 1860.55,2750.55 2140.55,2750.55 2150,2760 2688.48,2760 2701.95,2773.47 3346.53,2773.47 3459.3,2660.7 3467.72,2660.7 3486.51,2641.91 3486.51,2640 3487.8,2638.72 U1.81@3487.8,2605.12
  Bottom Layer w9.84: B5.4@1619.25,1985 1621.75,1987.5 1807.5,1987.5 v1(1810,1990) ; v1(1830,2320) 1836.39,2320 1850.93,2334.54 1853.04,2334.54 1860,2341.5 v1(1860,2750)
CAN1.TX: B5.1 U1.82 | length 2501.8
  Top Layer w9.84: v1(1760,2140) 1760,2146.39 1770,2156.39 1770,2252.77 1776.55,2259.32 1776.55,2316.55 v1(1780,2320) ; v1(1820,2721.18) 1826.39,2721.18 1837.57,2710 1872.16,2710 1893.03,2730.87 2148.7,2730.87 2158.15,2740.32 2696.63,2740.32 2710.1,2753.79 3338.37,2753.79 3451.14,2641.02 3459.56,2641.02 3467.03,2633.55 3467.03,2623.7 3468.11,2622.62 U1.82@3468.11,2605.12
  Bottom Layer w9.84: B5.1@1619.25,2135 1621.75,2137.5 1757.5,2137.5 v1(1760,2140) ; v1(1780,2320) 1785.46,2320 1821.5,2356.04 1821.5,2719.68 v1(1820,2721.18)
CAN3.RX: B6.4 U1.67 | length 2585.4
  Top Layer w9.84: v1(1620,2380) 1844.23,2380 1861.5,2362.74 1861.5,2235.33 1850,2223.84 v1(1850,2144.68) ; v1(3350.62,2149.37) 3350,2149.99 3350,2230.75 3349.68,2231.06 3349.68,2315.41 3368.45,2334.17 3394.54,2334.17 3499.61,2334.15 3545.76,2380.3 3618.31,2380.3 3619.87,2378.74 U1.67@3655.12,2378.74
  Bottom Layer w9.84: B6.4@1549.25,2385 1551.75,2382.5 1617.5,2382.5 v1(1620,2380) ; v1(1850,2144.68) 1885.39,2180.08 2640.2,2180.08 2660.28,2160 2833.3,2160 2853.3,2140 3098.01,2140 3114.6,2156.59 3301.81,2156.59 3309.03,2149.37 v1(3350.62,2149.37)
CAN3.TX: B6.1 U1.77 | length 2457
  Top Layer w9.84: v1(1580,2780) 1583.68,2776.32 1611.5,2776.32 1619.27,2768.54 1695.1,2768.54 1727.74,2801.18 2151.81,2801.18 2169.13,2818.5 3135.48,2818.5 3136.97,2820 v1(3470,2820) ; U1.77@3566.54,2605.12 3566.54,2648.01 3572.27,2653.74 v1(3572.27,2742.27)
  Bottom Layer w9.84: B6.1@1549.25,2535 1565,2535 1573.86,2543.86 1573.86,2767.47 1580,2773.61 v1(1580,2780) ; v1(3470,2820) 3474.52,2815.48 3494.52,2815.48 3567.73,2742.27 v1(3572.27,2742.27)
ESC_D.CH1: ESC1.2 U1.23 | length 1783
  Top Layer w9.84: v1(2950,1470) 2948.5,1471.5 2948.5,1584.27 2960.32,1596.08 2960.32,2054.09 3009.37,2103.15 U1.23@3044.88,2103.15
  Bottom Layer w9.84: v1(2950,1470) 3166.32,1470 3235.97,1539.65 3649.13,1539.65 3888.78,1300 ESC1.2@3910.43,1300
ESC_D.CH2: ESC2.2 U1.24 | length 3265.3
  Top Layer w9.84: v1(2980,1510) 2980,2045.94 3016.45,2082.39 3026.3,2082.39 3027.38,2083.46 U1.24@3044.88,2083.46 ; v1(3720,1582.21) 3833.78,1695.99 3875.99,1695.99 3953.58,1773.58 3953.58,1807.05 v1(3956.54,1810)
  Bottom Layer w9.84: v1(2980,1510) 3178.49,1510 3227.82,1559.33 3696.37,1559.33 3719.25,1582.21 v1(3720,1582.21) ; ESC2.2@3910.43,3200 3932.09,3200 3970.87,3161.22 3970.87,2840.86 4061.77,2749.95 4061.77,1881.77 3990,1810 v1(3956.54,1810)
ESC_D.CH3: ESC3.2 U1.25 | length 3782
  Top Layer w9.84: v1(1970,2420) 1970,2060 2000,2030 2000,1884.54 2020,1864.54 v1(2020,1861.5) ; v1(3020.21,1862.91) 3020.21,1953.67 3044.88,1978.34 U1.25@3044.88,2063.78
  Bottom Layer w9.84: ESC3.2@1019.57,3200 1041.22,3200 1241.22,3400 1770,3400 2001.5,3168.5 2001.5,2552.73 1988.9,2540.13 1988.9,2445.29 1970,2426.39 v1(1970,2420) ; v1(2020,1861.5) 2026.39,1861.5 2034.9,1870 2154.54,1870 2204.54,1920 2530.28,1920 2558.46,1891.81 2558.46,1889.77 2609.73,1838.5 2828.93,1838.5 2853.34,1862.91 v1(3020.21,1862.91)
ESC_D.CH4: ESC4.2 U1.26 | length 2616.7
  Top Layer w8: v1(2140,1540) 2140,1641.93 2140.57,1642.5 2140.57,1732.66 2140,1733.24 v1(2140,1798.5)
  Top Layer w9.84: v1(3102.89,1880) 3102.89,1886.39 3113.78,1897.28 U1.26@3113.78,1994.88
  Bottom Layer w8: ESC4.2@1009.57,1310 1031.22,1310 1210.65,1489.43 2089.43,1489.43 v1(2140,1540)
  Bottom Layer w9.84: v1(2140,1798.5) 2358.57,1798.5 2393.15,1833.08 2587.31,1833.08 2601.57,1818.82 3048.82,1818.82 3078.3,1848.3 3078.3,1855.41 v1(3102.89,1880)
Extra.PB2: IO1.7 U1.37 | length 1055.9
  Top Layer w9.84: v1(3250,1508.15) 3245.48,1512.67 3245.48,1559.44 3238.5,1566.42 3238.5,1813.1 3330.32,1904.91 U1.37@3330.32,1994.88
  Bottom Layer w9.84: IO1.7@3025,1075 3228.5,1278.5 3228.5,1394.72 3250,1416.21 v1(3250,1508.15)
Extra.PC4: BMI1.12 U1.33 | length 1399.4
  Top Layer w9.84: U1.33@3251.57,1994.88 3251.57,2053.88 3230,2075.46 3230,2342.2 3297.8,2410 v1(3300,2410)
  Bottom Layer w9.84: BMI1.12@2425,2575 2425,2572.05 2478.65,2518.39 3191.61,2518.39 v1(3300,2410)
Extra.PC5: BMI1.7 R8.1 R26.1 U1.34 | length 1141.6
  Top Layer w8: R8.1@2450,1633.74 2450,1731.59 2519.43,1801.01 v1(2519.43,1801.59) ; v1@2520,1801.59 2522.5,1804.09 2522.5,1872.5 BMI1.7@2525,1875
  Top Layer w9.84: v1(3164.04,1880) 3170.43,1880 3188.94,1898.5 3223.05,1898.5 3271.26,1946.72 U1.34@3271.26,1994.88
  Bottom Layer w9.84: v1(2519.43,1801.59) 2521.88,1799.13 2794.26,1799.13 2803.16,1790.24 3070.53,1790.24 3160.29,1880 v1(3164.04,1880)
Extra.PC14: IO1.6 U1.8 | length 1967.5
  Top Layer w9.84: v1(2649.38,1369.38) 2652.11,1372.11 2652.11,1400.87 2663.46,1412.23 2663.46,1643.93 2668.5,1648.97 2668.5,1918.5 v1(2670,1920) ; v1(2674.52,2100) 2674.52,2132.34 2898.52,2356.34 2898.52,2361.2 2942.93,2405.61 3009.85,2405.61 3015.75,2399.71 3024.18,2399.71 3024.38,2399.5 3026.3,2399.5 3027.38,2398.43 U1.8@3044.88,2398.43
  Bottom Layer w9.84: v1(2649.38,1369.38) 2789.3,1229.45 2789.3,1142.49 2924.71,1007.09 3057.09,1007.09 IO1.6@3125,1075 ; v1(2670,1920) 2674.52,1924.52 v1(2674.52,2100)
Extra.PC15: IO1.5 U1.9 | length 1996.8
  Top Layer w9.84: v1(2688.79,1393.5) 2688.79,1852.39 2700,1863.61 v1(2700,1870) ; v1(2706.02,2060.57) 2706.02,2135.99 2918.21,2348.19 2918.21,2353.05 2951.09,2385.93 3001.7,2385.93 3007.6,2380.02 3016.03,2380.02 3017.31,2378.74 U1.9@3044.88,2378.74
  Bottom Layer w9.84: v1(2688.79,1393.5) 2973.23,1109.06 2973.23,1058.57 3005.02,1026.77 3044.98,1026.77 3075,1056.79 3075,1093.2 3105.02,1123.23 3176.77,1123.23 IO1.5@3225,1075 ; v1(2700,1870) 2700,1905.46 2701.5,1906.95 2701.5,1969.65 2706.02,1974.17 v1(2706.02,2060.57)
Extra.PD2: IO1.4 U1.83 | length 1906.7
  Top Layer w8: IO1.4@3325,1075 3336.28,1086.28 3369.37,1086.28 3463.1,1180 3508.54,1180 3588.01,1259.46 3600.35,1259.46 3770,1429.12 v1(3770,1510) ; U1.83@3448.43,2605.12 3448.43,2571.57 3465.13,2554.87 3475.13,2554.87 v1(3480,2550)
  Bottom Layer w8: v1(3480,2550) 3690,2340 3690,1810 3770,1730 v1(3770,1510)
Extra.PD11: IO1.3 U1.58 | length 1432.3
  Top Layer w8: IO1.3@3425,1075 3512.16,1162.16 3515.94,1162.16 3595.4,1241.62 3607.74,1241.62 3800.57,1434.46 v1(3800.57,1476.14) ; U1.58@3655.12,2201.57 3699.24,2201.57 3702.88,2197.93 3739.13,2197.93 3741.99,2200.79 3789.21,2200.79 v1(3790,2200)
  Bottom Layer w8: v1(3790,2200) 3790,1845.79 3800.57,1835.22 v1(3800.57,1476.14)